# EAGLE board KAI_qua (EAGLE 9.4.2)
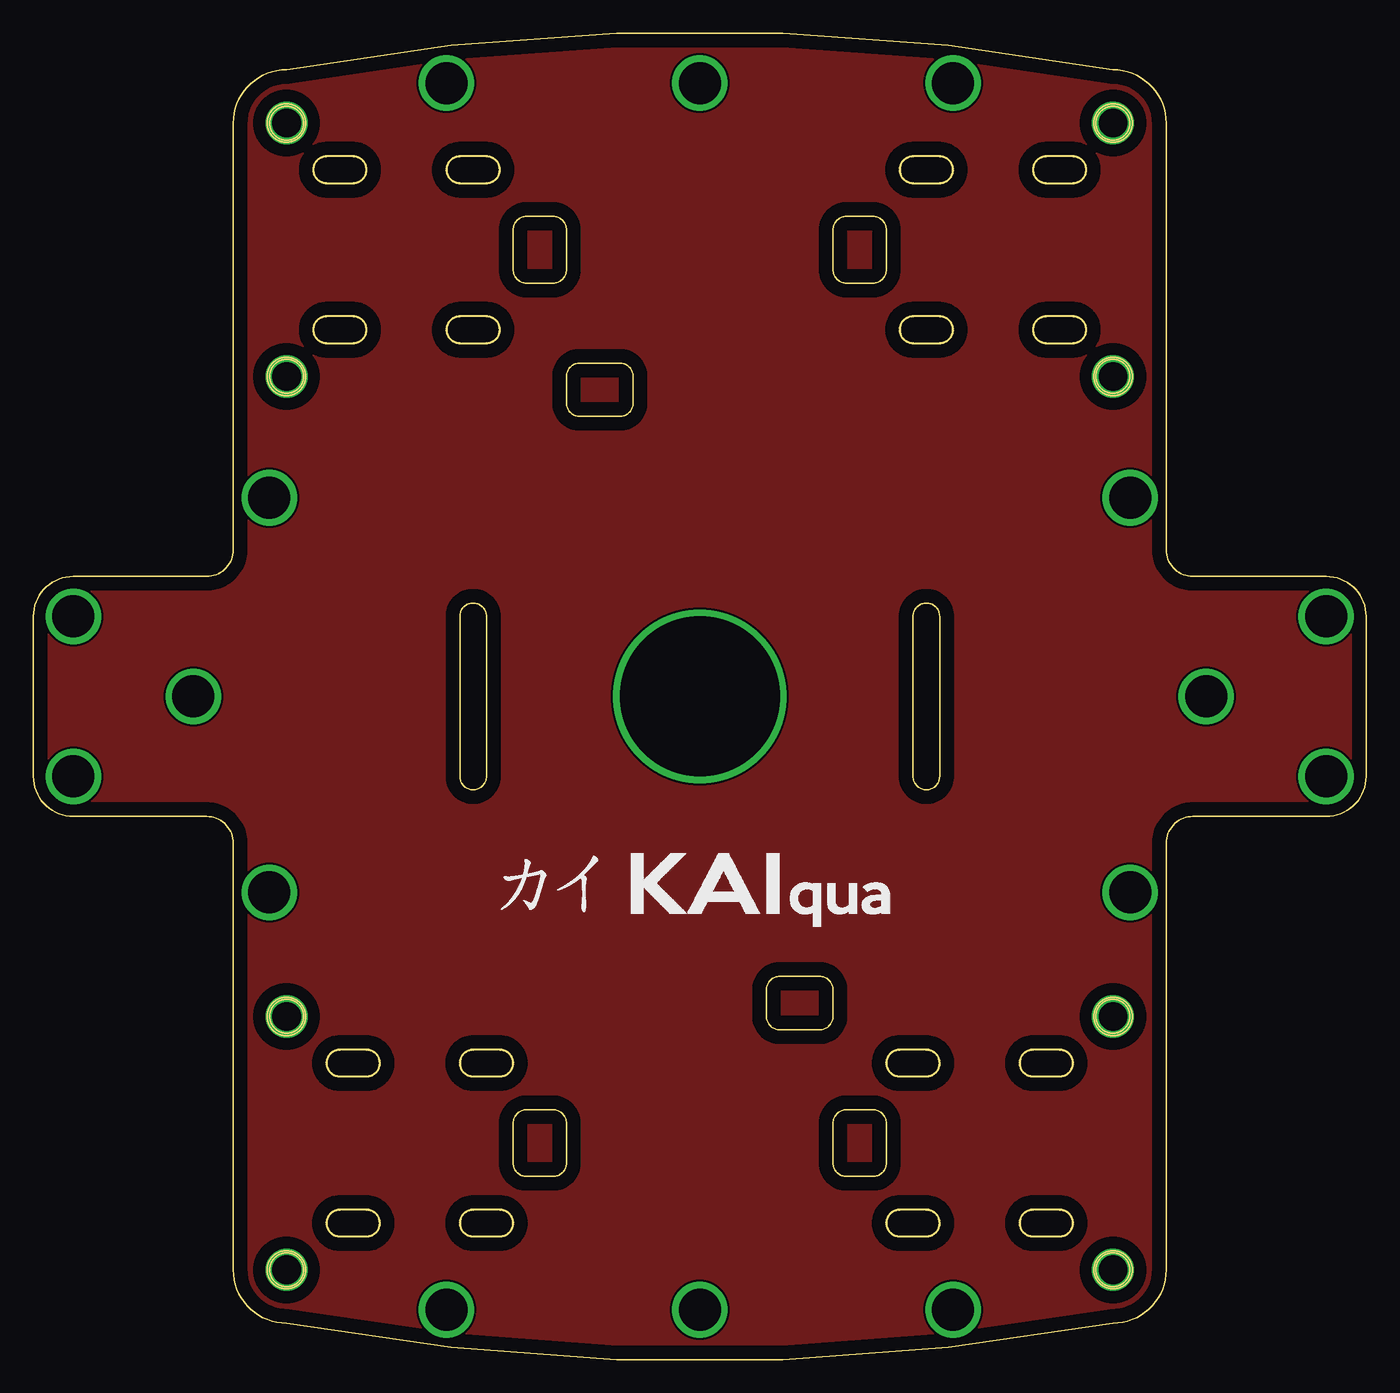
[diagram p0: board, top side]
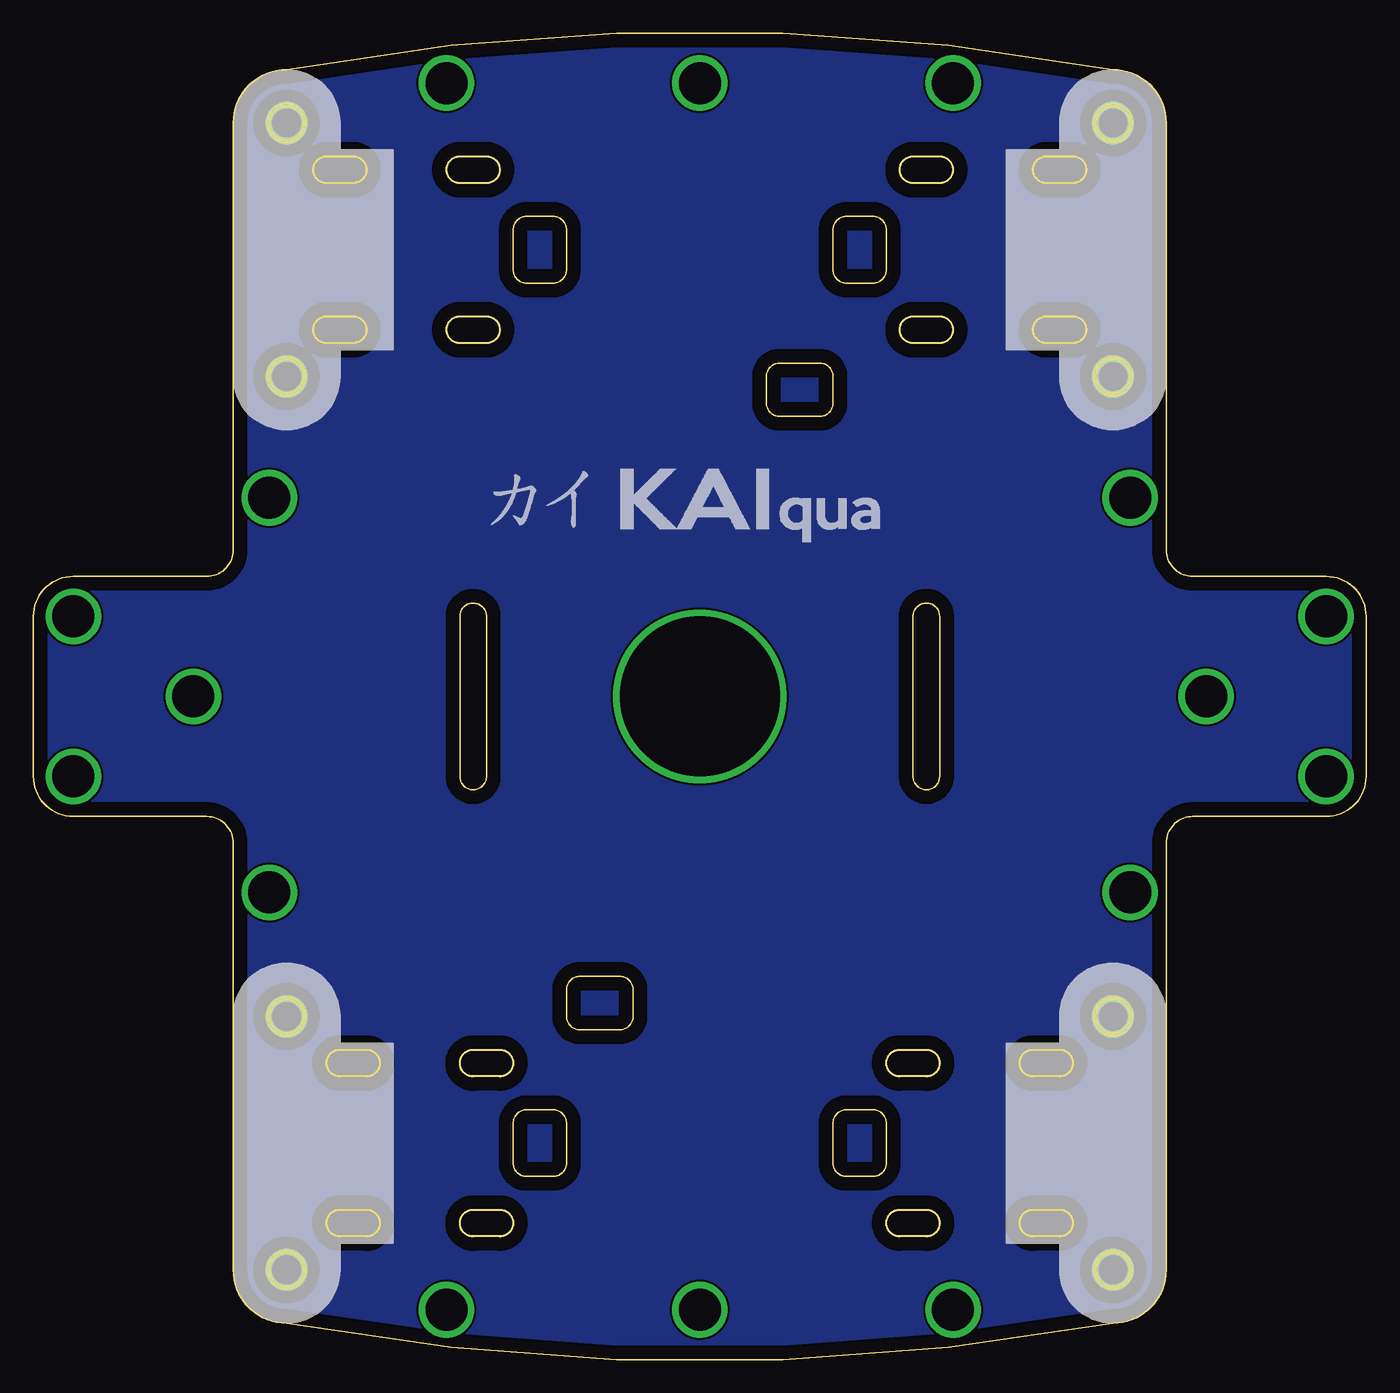
[diagram p1: board, bottom side, seen from below]

Size 100 x 99.46 mm. Coordinates in mm from the lower left corner, seen from the top.
Outline: 87,58.73 97,58.73 arc-90 100,55.73 100,43.73 arc-90 97,40.73 87,40.73 arc90 85,38.73 85,6.73 arc-90 81,2.73 arc-21 19,2.73 arc-90 15,6.73 15,38.73 arc90 13,40.73 3,40.73 arc-90 0,43.73 0,55.73 arc-90 3,58.73 13,58.73 arc90 15,60.73 15,92.73 arc-90 19,96.73 arc-21 81,96.73 arc-90 85,92.73 85,60.73 arc90 87,58.73
Outline: 37,85.73 39,85.73 arc-90 40,84.73 40,81.73 arc-90 39,80.73 37,80.73 arc-90 36,81.73 36,84.73 arc-90 37,85.73
Outline: 61,85.73 63,85.73 arc-90 64,84.73 64,81.73 arc-90 63,80.73 61,80.73 arc-90 60,81.73 60,84.73 arc-90 61,85.73
Outline: 39,13.73 37,13.73 arc-90 36,14.73 36,17.73 arc-90 37,18.73 39,18.73 arc-90 40,17.73 40,14.73 arc-90 39,13.73
Outline: 63,13.73 61,13.73 arc-90 60,14.73 60,17.73 arc-90 61,18.73 63,18.73 arc-90 64,17.73 64,14.73 arc-90 63,13.73
Outline: 45,73.73 45,71.73 arc-90 44,70.73 41,70.73 arc-90 40,71.73 40,73.73 arc-90 41,74.73 44,74.73 arc-90 45,73.73
Outline: 55,25.73 55,27.73 arc-90 56,28.73 59,28.73 arc-90 60,27.73 60,25.73 arc-90 59,24.73 56,24.73 arc-90 55,25.73
Outline: 32,55.73 arc-90 33,56.73 arc-90 34,55.73 34,43.73 arc-90 33,42.73 arc-90 32,43.73 32,55.73
Outline: 66,55.73 arc-90 67,56.73 arc-90 68,55.73 68,43.73 arc-90 67,42.73 arc-90 66,43.73 66,55.73
Outline: 22,76.23 24,76.23 arc90 25,77.23 arc90 24,78.23 22,78.23 arc90 21,77.23 arc90 22,76.23
Outline: 22,88.23 24,88.23 arc90 25,89.23 arc90 24,90.23 22,90.23 arc90 21,89.23 arc90 22,88.23
Outline: 32,76.23 34,76.23 arc90 35,77.23 arc90 34,78.23 32,78.23 arc90 31,77.23 arc90 32,76.23
Outline: 32,88.23 34,88.23 arc90 35,89.23 arc90 34,90.23 32,90.23 arc90 31,89.23 arc90 32,88.23
Outline: 76,76.23 78,76.23 arc90 79,77.23 arc90 78,78.23 76,78.23 arc90 75,77.23 arc90 76,76.23
Outline: 76,88.23 78,88.23 arc90 79,89.23 arc90 78,90.23 76,90.23 arc90 75,89.23 arc90 76,88.23
Outline: 66,76.23 68,76.23 arc90 69,77.23 arc90 68,78.23 66,78.23 arc90 65,77.23 arc90 66,76.23
Outline: 66,88.23 68,88.23 arc90 69,89.23 arc90 68,90.23 66,90.23 arc90 65,89.23 arc90 66,88.23
Outline: 23,9.23 25,9.23 arc90 26,10.23 arc90 25,11.23 23,11.23 arc90 22,10.23 arc90 23,9.23
Outline: 23,21.23 25,21.23 arc90 26,22.23 arc90 25,23.23 23,23.23 arc90 22,22.23 arc90 23,21.23
Outline: 33,9.23 35,9.23 arc90 36,10.23 arc90 35,11.23 33,11.23 arc90 32,10.23 arc90 33,9.23
Outline: 33,21.23 35,21.23 arc90 36,22.23 arc90 35,23.23 33,23.23 arc90 32,22.23 arc90 33,21.23
Outline: 65,9.23 67,9.23 arc90 68,10.23 arc90 67,11.23 65,11.23 arc90 64,10.23 arc90 65,9.23
Outline: 65,21.23 67,21.23 arc90 68,22.23 arc90 67,23.23 65,23.23 arc90 64,22.23 arc90 65,21.23
Outline: 75,9.23 77,9.23 arc90 78,10.23 arc90 77,11.23 75,11.23 arc90 74,10.23 arc90 75,9.23
Outline: 75,21.23 77,21.23 arc90 78,22.23 arc90 77,23.23 75,23.23 arc90 74,22.23 arc90 75,21.23
Copper layers (1*16): Top 0.035mm / dielectric 0.15mm / Bottom 0.035mm
Design rules "default": minimum track width 6mil, minimum drill 0.35mm, track to track 6mil, track to pad 6mil, pad to pad 6mil, via to via 6mil, smd to smd 6mil, copper to edge 40mil, drill to drill 6mil, minimum pad ring 10mil, minimum via ring 8mil, stop-mask expansion 4mil, vias tented up to drill 0mil, thermal gap 10mil

## Placement (x,y rotation side)
E$1  [12M_MOTOR]  82,72.73 0 top
E$2  [12M_MOTOR]  18,93.73 180 top
E$3  [12M_MOTOR]  18,26.73 180 top
E$4  [12M_MOTOR]  82,5.73 0 top

## Library data of the parts
E$1-E$4 = 12mm_motor

## Tracks (layer width: path | path; a pad name or v marks a point on that pad's centre or on a via)
G
  pour Top: 3,58.73 13,58.73 arc90 15,60.73 15,92.73 arc-90 19,96.73 30,98.73 45,99.73 56,99.73 69,98.73 81,96.73 arc-90 85,92.73 85,60.73 arc90 87,58.73 97,58.73 arc-90 100,55.73 100,43.73 arc-90 97,40.73 87,40.73 arc90 85,38.73 85,6.73 arc-90 81,2.73 69,0.73 54,-0.27 44,-0.27 32,0.73 24,1.73 19,2.73 arc-90 15,6.73 15,38.73 arc90 13,40.73 3,40.73 arc-90 0,43.73 0,55.73 arc-90
  pour Bottom: 97,58.73 87,58.73 arc-90 85,60.73 85,92.73 arc90 81,96.73 70,98.73 55,99.73 44,99.73 31,98.73 19,96.73 arc90 15,92.73 15,60.73 arc-90 13,58.73 3,58.73 arc90 0,55.73 0,43.73 arc90 3,40.73 13,40.73 arc-90 15,38.73 15,6.73 arc90 19,2.73 31,0.73 46,-0.27 56,-0.27 68,0.73 76,1.73 81,2.73 arc90 85,6.73 85,38.73 arc-90 87,40.73 97,40.73 arc90 100,43.73 100,55.73 arc90
S$1  (via drill 2.15)
  other vias: 19,92.73
S$2  (via drill 2.15)
  other vias: 19,73.73
S$3  (via drill 2.15)
  other vias: 81,92.73
S$4  (via drill 2.15)
  other vias: 81,73.73
S$5  (via drill 2.15)
  other vias: 19,25.73
S$6  (via drill 2.15)
  other vias: 19,6.73
S$7  (via drill 2.15)
  other vias: 81,6.73
S$8  (via drill 2.15)
  other vias: 81,25.73
S$9  (via drill 3.15)
  other vias: 17.7,64.63
S$10  (via drill 3.15)
  other vias: 82.3,64.63
S$11  (via drill 3.15)
  other vias: 82.3,35.03
S$12  (via drill 3.15)
  other vias: 17.7,35.03
S$13  (via drill 3.15)
  other vias: 3,55.73
S$14  (via drill 3.15)
  other vias: 3,43.73
S$15  (via drill 3.15)
  other vias: 97,55.73
S$16  (via drill 3.15)
  other vias: 97,43.73
S$17  (via drill 3.15)
  other vias: 88,49.73
S$18  (via drill 3.15)
  other vias: 12,49.73
S$19  (via drill 3.15)
  other vias: 31,95.73
S$20  (via drill 3.15)
  other vias: 69,95.73
S$21  (via drill 3.15)
  other vias: 50,95.73
S$22  (via drill 3.15)
  other vias: 31,3.73
S$23  (via drill 3.15)
  other vias: 69,3.73
S$24  (via drill 3.15)
  other vias: 50,3.73
S$25  (via drill 12)
  other vias: 50,49.73